# Altium PCB Rangefinder_PCB.PcbDoc
Units mm, origin at the board's own origin, x right, y up, seen from the top; angles counter-clockwise.
Board outline 27.89 x 25 mm, 2 copper layers (Top Layer, Bottom Layer); 38 components, 29 nets, 163 pads, 23 vias.
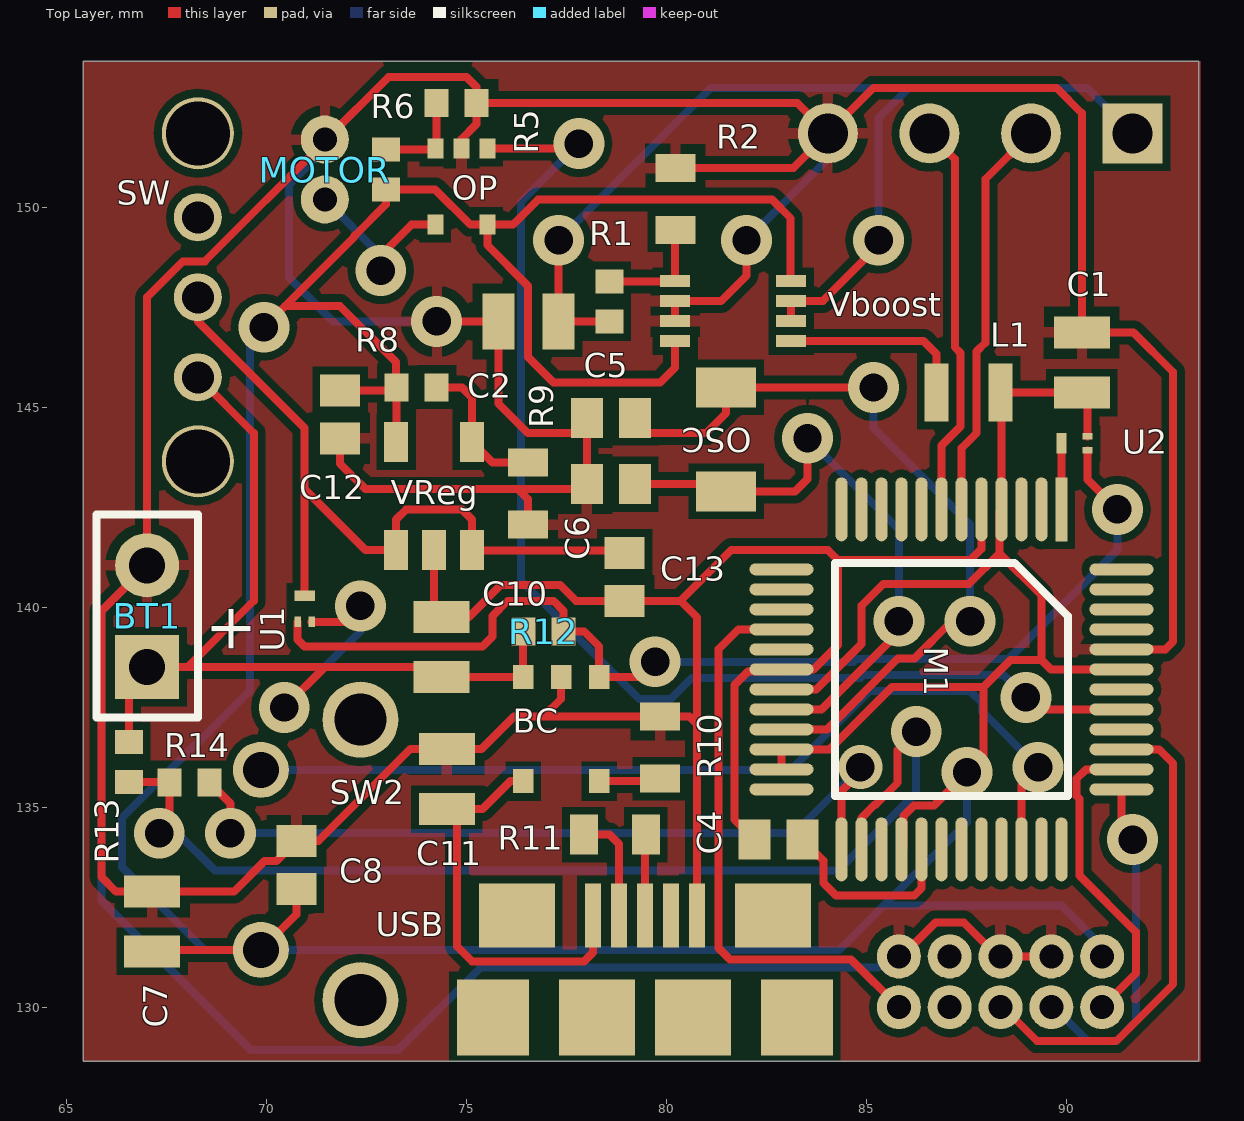
[diagram p0: Top Layer view]
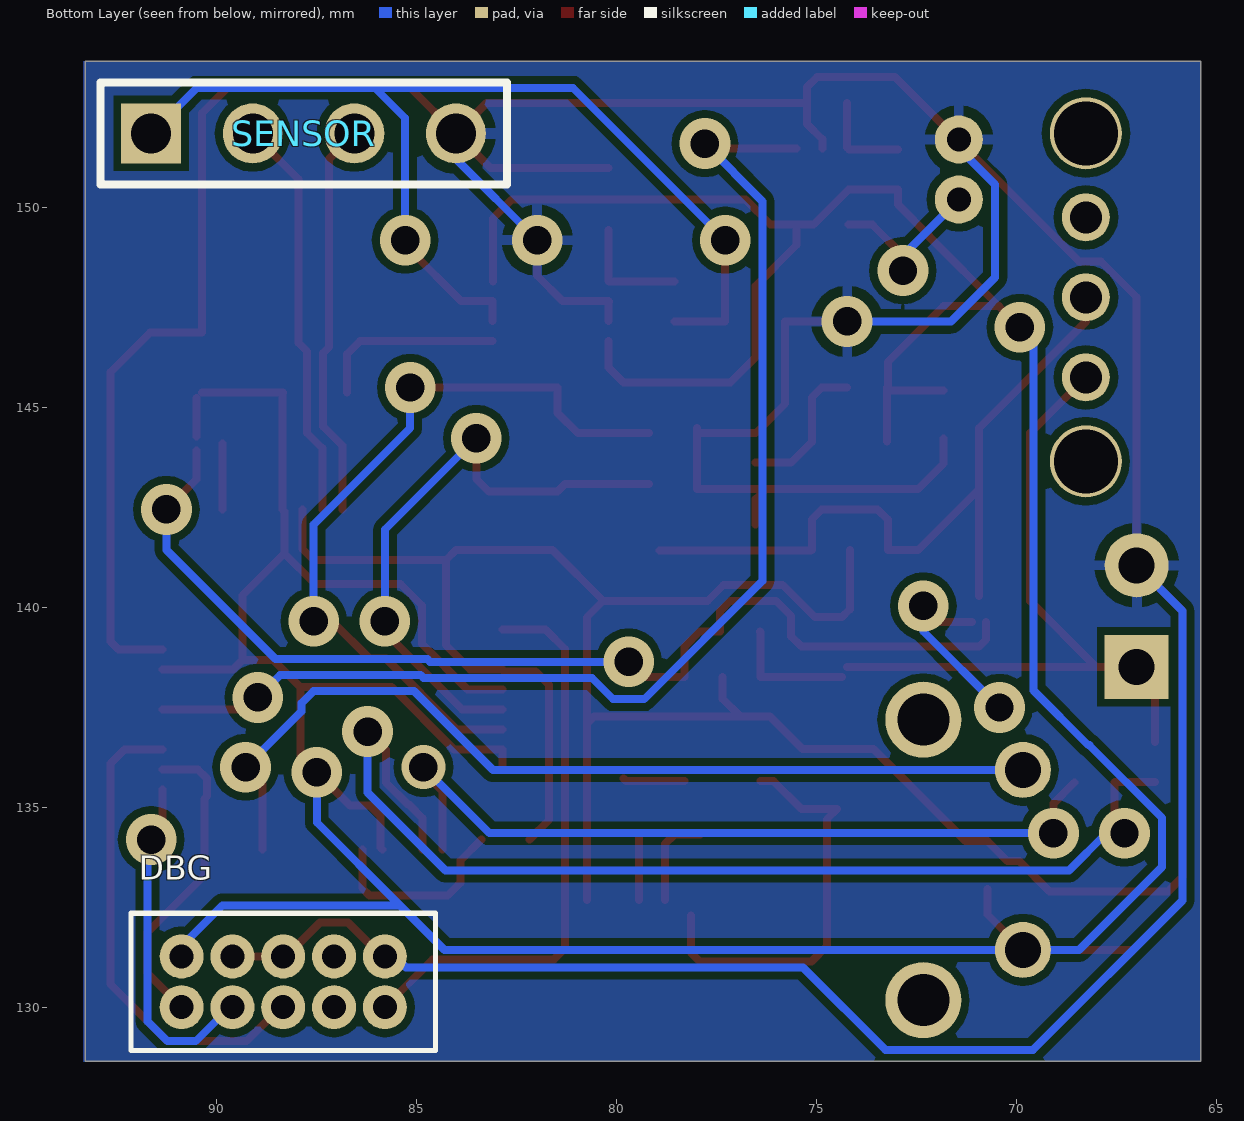
[diagram p1: Bottom Layer view, seen from below]

## Layer stack, top to bottom
Top Layer: signal copper 0.0356
Dielectric: dielectric 0.32, FR-4, Dk 4.8
Bottom Layer: signal copper 0.0356

## Board outline
65.405,128.67 93.294,128.67 93.294,153.67 65.405,153.67

## Design rules (kind name [scope] priority, off if disabled: settings)
Clearance [All] p1: gap=0.2
PolygonConnect [All] p1: connectstyle=Relief reliefconductorwidth=0.254 reliefentries=4 polygonreliefangle="90 Angle" airgapwidth=0.254
RoutingVias [All] p1: holewidth=0.711 width=1.27 viastyle="Through Hole" minholewidth=0.711 minwidth=1.27 maxholewidth=0.711 maxwidth=1.27
SolderMaskExpansion [All] p1: expansion=0.102
Width [All] p1: maxlimit=0.2 minlimit=0.2 preferedwidth=0.2
28 further rules are at their usual default settings.

## Components (designator, comment, footprint, x,y, rotation, side; value= is the part's Value field where it differs from the comment)
BC "MCP73831T" MCP73831T 78.308,138.271 r180 top
BT1 "Battery" BAT-2 67.005,139.795 r90 top
C1 "4.7u" "Capacitor 0805" 90.373,145.383 r90 top
C2 "10u" "Capacitor 0805" 77.292,147.161 r180 top
C4 "1u" "Capacitor 0402" 83.388,134.207 r180 top
C5 "12p" "Capacitor 0402" 79.197,144.748 r180 top
C6 "12p" "Capacitor 0402" 79.197,143.097 r180 top
C7 "4.7u" "Capacitor 0805" 67.132,131.413 r90 top
C8 "100n" "Capacitor 0402" 70.739,132.969 r90 top
C10 "4.7u" "Capacitor 0805" 74.371,138.271 r90 top
C11 "4.7u" "Capacitor 0805" 74.498,134.969 r90 top
C12 "1u" "Capacitor 0402" 71.831,144.24 r90 top
C13 "1u" "Capacitor 0402" 78.943,140.176 r90 top
DBG "20021111-00010T4LF" 20021111-00010T4LF 88.341,130.651 r0 bottom
L1 "LBR2012T4R7M" LBR2012T4R7M 88.341,145.383 r180 top
M1 "EFM32TG822" EFM32TG822 89.865,142.462 r270 top
MOTOR "Motor" Motor 71.45,150.209 r90 top
OP "LMV321SQ3T2G" LMV321SQ3T2G 75.514,151.479 r270 top
OSC "ST3215SB32768H5HSZA1" ST3215SB32768H5HSZA1 81.483,145.51 r270 top
R1 "1M" "Resistor 0403" 78.562,147.161 r90 top
R2 "324k" "Resistor 0603" 80.213,149.447 r90 top
R5 "1M" "Resistor 0403" 74.244,152.622 r0 top
R6 "1M" "Resistor 0403" 72.974,150.463 r90 top
R8 "1M" "Resistor 0403" 74.244,145.51 r180 top
R9 "536k" "Resistor 0603" 76.53,142.081 r90 top
R10 "3k" "Resistor 0603" 79.832,135.731 r90 top
R11 "150R" "Resistor 0603" 77.927,134.334 r0 top
R12 "18.7k" "Resistor 0403" 77.419,139.414 r180 top
R13 "1M" "Resistor 0403" 66.548,136.652 r270 top
R14 "1M" "Resistor 0403" 67.564,135.636 r0 top
SENSOR "Header 4" HDR1X4 91.643,151.86 r180 bottom
SW "EG1247" EG1247 68.275,145.764 r90 top
SW2 "2-1825027-0" 2-1825027-0 72.339,133.699 r270 top
U1 "CSD23382F4T" CSD23382F4T 70.942,140.303 r0 top
U2 "CSD23382F4T" CSD23382F4T 89.865,144.113 r90 top
USB "649-10118192-0001LF" 649-10118192-0001LF 79.451,129.762 r0 top
Vboost "MCP1640T-I/MC" MCP1640T-I/MC 80.207,148.172 r0 top
VReg "TPS78001DDCR" TPS78001DDCR 73.228,141.446 r0 top

## Footprints (in the part's own frame and the unit in brackets; to place one, negate y for a bottom-side part, rotate by r counter-clockwise, add the part's x,y. Pads: shape width x height; smd on the part's side, far side on the other; paste and mask are expansions set on the pad)
2-1825027-0 [mm]
  round 1.4 hole 0.9: 1(-2.25,-2.49) 2(2.25,-2.49)
  round 1.9 hole 1.3: ""(-3.505,0) ""(3.505,0)
649-10118192-0001LF [mm]
  rect 0.4x1.6 smd: 1(-1.3,2.55) 2(-0.65,2.55) 3(0,2.55) 4(0.65,2.55) 5(1.3,2.55)
  rect 1.8x1.9 smd: ""(-3.8,0) ""(3.8,0)
  rect 1.9x1.6 smd: ""(-3.2,2.55) ""(3.2,2.55)
  rect 1.9x1.9 smd: ""(-1.2,0) ""(1.2,0)
20021111-00010T4LF [mm]
  round 1.1 hole 0.6: 1(-2.54,0.635) 2(-1.27,0.635) 3(0,0.635) 4(1.27,0.635) 5(2.54,0.635) 6(-2.54,-0.635) 7(-1.27,-0.635) 8(0,-0.635) 9(1.27,-0.635) 10(2.54,-0.635)
  silkscreen extent -3.81,-1.72 3.81,1.72
BAT-2 [mm] "Battery; 2 Leads"
  rect 1.6x1.6 hole 0.9: 1(-1.27,0)
  round 1.6 hole 0.9: 2(1.27,0)
  silkscreen extent -2.54,-1.27 2.54,1.27
"Capacitor 0402" [mm]
  rect 0.8x1 smd: 1(0,0) 2(1.2,0)
"Capacitor 0805" [mm]
  rect 0.8x1.4 smd: 1(0,0) 2(1.5,0)
CSD23382F4T [mm]
  rect 0.51x0.26 smd: 1(0,0)
  rect 0.16x0.26 smd: 2(-0.175,-0.65) 3(0.175,-0.65)
EFM32TG822 [mm]
  rect 1.6x0.3 smd: 1(0,0)
  oval 1.6x0.3 smd: 2(0,-0.5) 3(0,-1) 4(0,-1.5) 5(0,-2) 6(0,-2.5) 7(0,-3) 8(0,-3.5) 9(0,-4) 10(0,-4.5) 11(0,-5) 12(0,-5.5) 25(8.5,-5.5) 26(8.5,-5) 27(8.5,-4.5) 28(8.5,-4) 29(8.5,-3.5) 30(8.5,-3) 31(8.5,-2.5) 32(8.5,-2) 33(8.5,-1.5) 34(8.5,-1) 35(8.5,-0.5) 36(8.5,0)
  oval 0.3x1.6 smd: 13(1.5,-7) 14(2,-7) 15(2.5,-7) 16(3,-7) 17(3.5,-7) 18(4,-7) 19(4.5,-7) 20(5,-7) 21(5.5,-7) 22(6,-7) 23(6.5,-7) 24(7,-7) 37(7,1.5) 38(6.5,1.5) 39(6,1.5) 40(5.5,1.5) 41(5,1.5) 42(4.5,1.5) 43(4,1.5) 44(3.5,1.5) 45(3,1.5) 46(2.5,1.5) 47(2,1.5) 48(1.5,1.5)
  silkscreen extent 1.33,-5.66 7.16,0.17
EG1247 [mm]
  round 1.2 hole 0.8: 1(0,0) 2(2,0) 3(4,0)
  round 1.8 hole 1.6: ""(-2.1,0) ""(6.1,0)
HDR1X4 [mm] "Connector; Header; 4 Position"
  rect 1.5x1.5 hole 1: 1(0,0)
  round 1.5 hole 1: 2(2.54,0) 3(5.08,0) 4(7.62,0)
  silkscreen extent -1.27,-1.27 8.89,1.27
LBR2012T4R7M [mm]
  rect 0.6x1.45 smd: 1(0,0) 2(1.6,0)
LMV321SQ3T2G [mm]
  rect 0.5x0.4 smd: 1(0,0) 2(0,-0.65) 3(0,-1.3) 4(1.9,-1.3) 5(1.9,0)
MCP1640T-I/MC [mm]
  rect 0.75x0.3 smd: 1(0,0) 2(0,-0.5) 3(0,-1) 4(0,-1.5) 5(2.9,-1.5) 6(2.9,-1) 7(2.9,-0.5) 8(2.9,0)
MCP73831T [mm]
  rect 0.51x0.6 smd: 1(0,0) 2(0.95,0) 3(1.9,0) 4(1.9,2.6) 5(0,2.6)
Motor [mm]
  round 1.2 hole 0.6: 1(0,0) 2(1.5,0)
"Resistor 0403" [mm]
  rect 0.6x0.7 smd: 1(0,0) 2(1,0)
"Resistor 0603" [mm]
  rect 0.7x1 smd: 1(0,0) 2(1.55,0)
ST3215SB32768H5HSZA1 [mm]
  rect 1x1.5 smd: 1(0,0) 2(2.6,0)
TPS78001DDCR [mm]
  rect 0.6x1 smd: 1(0,0) 2(0.95,0) 3(1.9,0) 4(1.9,2.7) 5(0,2.7)

## Part data
BT1: "Multicell Battery"
C1 C2 C7 C10 C11: library part "Capacitor 0805"
C4 C5 C6 C8 C12 C13: library part "Capacitor 0402"
R1 R5 R6 R8 R12 R13 R14: library part "Resistor 0403"
R2 R9 R10 R11: library part "Resistor 0603"
SENSOR: "Header, 4-Pin"

## Via types
v1: diameter 1.27, hole 0.711, Top Layer to Bottom Layer, 22 vias
v2: diameter 1.1, hole 0.711, Top Layer to Bottom Layer, 1 vias

## Nets (pads, with @x,y where several pads share a name; then routed paths per layer and width w, separated by ;. In a path a pad name is that pad's centre, name@x,y a point inside that pad or via, vN(x,y) a via of type N, cw(c..) or ccw(c..) an arc to the next point about the centre after c; other vN are vias at no path point)
3V5: C1.1 C7.1 C8.1 C12.2 DBG.10 L1.1 M1.4 M1.19 M1.22 M1.23 M1.28 M1.43 OP.5 R6.1 R8.2 SW2.2 U2.3 Vboost.4 Vboost.8 VReg.5 | length 114.7
  Top Layer w0.2: C7.1 67.168,131.449 SW2.2@69.214,131.449 ; SW2.2 70.739,132.339 C8.1 ; v1(69.926,147.016) 70.452,147.542 ; C12.2 R8.2@73.158,145.44 ; R8.2@73.228,145.44 73.228,146.145 71.831,147.542 70.452,147.542 ; VReg.5@73.244,144.162 R8.2 ; Vboost.4 80.207,146.012 79.832,145.637 77.165,145.637 76.53,146.272 76.53,148.05 75.514,149.066 OP.5 ; M1.23 M1.22 84.069,136.462 85.63,138.023 87.914,138.023 ; M1.19 83.733,137.962 84.866,139.095 84.866,140.055 85.414,140.603 87.556,140.603 88.315,141.362 ; Vboost.8@83.096,148.161 83.096,149.739 82.626,150.209 76.784,150.209 76.154,149.579 OP.5 ; M1.28 85.915,134.012 85.915,134.798 86.179,135.062 86.675,135.062 v1(87.503,135.89) 87.914,136.301 87.914,138.023 ; v1@87.048,135.962 v1@87.071,135.985 ; C1.1 L1.1 88.365,145.359 M1.4 88.315,142.412 88.315,141.362 ; U2.3 C1.1@90.515,145.241 ; M1.43 89.599,138.462 89.363,138.698 ; 70.452,147.542 72.196,149.286 72.196,149.304 72.974,150.082 R6.1 74.204,150.463 75.088,149.579 OP.5 ; 87.914,138.023 88.589,138.698 89.363,138.698 ; 88.315,141.362 89.363,140.314 89.363,138.698
  Bottom Layer w0.2: v1(69.926,147.016) 69.583,146.673 69.583,137.936 68.214,136.567 68.188,136.567 66.375,134.753 66.375,133.523 68.449,131.449 SW2.2 69.854,131.444 84.308,131.444 85.42,132.556 ; v1(87.503,135.89) 87.503,134.639 85.42,132.556 ; DBG.10@90.881,131.54 89.865,132.556 85.42,132.556
4V2: BC.3 BT1.1 C10.1 R12.2 R13.1 SW.1 U1.3 | length 27.1
  Top Layer w0.2: R13.1 66.548,138.068 BT1.1 68.021,138.525 ; SW.1 69.672,144.367 69.672,140.176 68.021,138.525 ; v1(70.434,137.509) 71.45,138.525 ; U1.3 71.943,139.653 v1(72.339,140.049) ; C10.1@74.244,138.525 71.45,138.525 ; C10.1 BC.3 76.408,139.403 R12.2 ; 68.021,138.525 71.45,138.525
  Bottom Layer w0.2: v1(70.434,137.509) 72.339,139.414 v1(72.339,140.049)
5V: C2.1 R1.1 SENSOR.1 Vboost.6 Vboost.7 | length 27.2
  Top Layer w0.2: v1(77.292,149.193) C2.1 R1.1 ; Vboost.6 Vboost.7 83.899,147.672 85.166,148.939 v1@85.166,149.193
  Bottom Layer w0.2: v1(77.292,149.193) 81.102,153.003 86.055,153.003 ; v1(85.293,149.193) 85.293,152.241 86.055,153.003 ; SENSOR.1 90.5,153.003 86.055,153.003
CHARGE: M1.1 U2.1 | length 1.7
  Top Layer w0.2: M1.1 U2.1
ECHO: M1.7 SENSOR.3 | length 9.9
  Top Layer w0.2: SENSOR.3 87.198,151.225 87.198,146.518 87.341,146.375 87.341,144.534 86.865,144.058 M1.7
GND: BC.2 BT1.2 C1.2 C2.2 C4.2 C5.2 C6.2 C7.2 C8.2 C10.2 C11.2 C12.1 C13.1 DBG.6 DBG.8 DBG.9 M1.5 M1.18 M1.44 MOTOR.2 OP.2 R2.2 R5.2 R9.1 R10.2 SENSOR.4 USB.5 Vboost.2 Vboost.3 VReg.2 | length 183.1
  Top Layer w0.2: C12.1 71.831,143.605 72.466,142.97 76.276,142.97 ; VReg.2 74.178,139.964 C10.2 75.051,139.771 75.856,140.576 77.331,140.576 77.731,140.176 C13.1 80.34,140.176 ; v1(74.244,147.161) C2.2 75.792,145.105 76.53,144.367 C5.2@77.997,144.367 ; OP.2 74.864,151.718 75.244,152.098 R5.2 ; R9.1 76.53,142.716 76.276,142.97 ; BC.2 77.358,137.728 76.911,137.281 ; C5.2@77.997,144.494 C5.2@77.997,144.367 ; Vboost.2@80.196,147.661 80.207,147.661 Vboost.3 ; Vboost.2 81.359,147.672 81.991,148.304 v1(81.991,149.193) ; R2.2 83.16,150.997 SENSOR.4 ; USB.5@80.751,132.691 80.751,137.098 ; C4.2 81.691,134.704 81.691,138.074 82.029,138.412 82.815,138.412 M1.18 83.667,138.462 84.277,139.072 84.277,141.192 ; DBG.6 85.869,131.286 86.719,132.136 87.423,132.136 88.273,131.286 DBG.8 DBG.9 ; DBG.6@85.801,131.54 DBG.6@85.869,131.54 ; M1.5 87.865,141.478 87.579,141.192 84.277,141.192 ; DBG.8@88.273,131.54 DBG.8@88.341,131.54 ; M1.44 92.461,138.962 92.659,139.16 92.659,145.891 91.667,146.883 C1.2 90.373,152.368 89.738,153.003 85.166,153.003 SENSOR.4 ; R5.2 83.261,152.622 SENSOR.4 ; R5.2 75.244,153.019 74.991,153.272 73.044,153.272 71.481,151.709 MOTOR.2 71.45,151.666 68.448,148.664 67.902,148.664 67.005,147.767 BT1.2 65.862,139.922 65.862,133.274 66.223,132.913 C7.2 69.183,132.913 69.939,133.669 70.239,133.669 C8.2 71.285,134.169 73.585,136.469 C11.2 75.363,136.469 76.175,137.281 76.911,137.281 ; 76.276,142.97 77.997,142.97 C6.2 C5.2@77.997,144.367 ; 76.911,137.281 R10.2 80.568,137.281 80.751,137.098 ; 80.34,140.176 80.751,139.765 80.751,137.098 ; 80.34,140.176 81.61,141.446 84.023,141.446 84.277,141.192
  Bottom Layer w0.2: BT1.2 65.862,139.922 65.862,132.683 69.601,128.944 73.279,128.944 75.348,131.013 85.274,131.013 DBG.6@85.801,131.54 ; MOTOR.2 71.45,151.482 70.55,150.582 70.55,148.262 71.651,147.161 v1(74.244,147.161) ; v1(81.991,149.193) 84.023,151.225 SENSOR.4
MOTOR: M1.41 OP.1 | length 30.7
  Top Layer w0.2: OP.1 77.673,151.479 v1(77.8,151.606) ; v1(88.976,137.763) 89.277,137.462 M1.41
  Bottom Layer w0.2: v1(77.8,151.606) 76.357,150.163 76.357,140.678 79.318,137.717 80.092,137.717 80.627,138.252 84.835,138.252 84.905,138.322 88.417,138.322 v1(88.976,137.763)
NetBC_5: BC.5 R10.1 | length 1.5
  Top Layer w0.2: BC.5 79.772,135.671 R10.1
NetC4_1: C4.1 M1.29 | length 4.9
  Top Layer w0.2: C4.1 83.915,133.68 83.915,133.126 84.231,132.81 86.182,132.81 86.365,132.993 M1.29
NetC13_2: C13.2 SW.2 U1.1 VReg.1 VReg.3 | length 18.9
  Top Layer w0.2: SW.2 68.275,147.161 70.942,144.494 70.942,142.97 ; U1.1 70.942,142.97 ; C13.2@78.934,141.431 75.143,141.431 VReg.3 75.128,142.213 74.879,142.462 73.482,142.462 73.228,142.208 VReg.1 72.466,141.446 70.942,142.97
NetL1_2: L1.2 Vboost.5 | length 4.7
  Top Layer w0.2: Vboost.5 86.417,146.672 86.741,146.348 L1.2
NetM1_25: M1.25 R14.2 | length 20
  Top Layer w0.2: R14.2 69.088,135.112 v1(69.088,134.366) ; M1.25 84.365,135.419 v2@84.836,135.89
  Bottom Layer w0.2: v1(69.088,134.366) 83.185,134.366 v2(84.836,136.017)
NetM1_26: M1.26 R13.2 R14.1 | length 27.6
  Top Layer w0.2: R13.2 67.548,135.652 R14.1 67.564,134.62 v1(67.31,134.366) ; M1.26 84.865,134.748 85.199,135.082 85.223,135.082 85.771,135.63 85.771,136.444 v1(86.233,136.906)
  Bottom Layer w0.2: v1(67.31,134.366) 67.766,134.366 68.701,133.431 84.282,133.431 86.233,135.382 v1(86.233,136.906)
NetM1_34: M1.34 SW2.1 | length 23.4
  Top Layer w0.2: M1.34 88.865,135.601 v1(89.281,136.017)
  Bottom Layer w0.2: SW2.1 83.098,135.949 85.071,137.922 87.579,137.922 87.884,137.617 87.884,137.414 v1(89.281,136.017)
NetMOTOR_1: MOTOR.1 OP.4 | length 4.4
  Top Layer w0.2: v1(72.847,148.431) 72.847,148.812 73.614,149.579 OP.4
  Bottom Layer w0.2: MOTOR.1 72.847,148.812 v1(72.847,148.431)
NetOP_3: OP.3 R5.1 R6.2 | length 2.4
  Top Layer w0.2: R6.2 74.198,151.463 OP.3 74.244,151.509 R5.1
NetR1_2: R1.2 R2.1 Vboost.1 | length 2.9
  Top Layer w0.2: R1.2 80.196,148.161 Vboost.1 80.207,149.441 R2.1
NetR8_1: R8.1 R9.2 VReg.4 | length 3.7
  Top Layer w0.2: R8.1 74.879,145.51 75.128,145.261 VReg.4 75.643,143.631 R9.2
NetR11_1: R11.1 USB.2 | length 2.4
  Top Layer w0.2: R11.1 78.562,134.334 78.801,134.095 USB.2@78.801,132.691
NetR11_2: R11.2 USB.3 | length 1.7
  Top Layer w0.2: USB.3@79.451,132.691 79.451,134.308 R11.2
RESETN: DBG.1 M1.16 | length 14.4
  Top Layer w0.2: M1.16 81.785,139.462 81.291,138.968 81.291,131.498 81.577,131.212 84.605,131.212 DBG.1
STAT: BC.1 R12.1 U1.2 U2.2 | length 27.4
  Top Layer w0.2: U1.2 70.767,139.208 70.942,139.033 75.387,139.033 75.641,139.287 75.641,139.795 76.022,140.176 77.165,140.176 77.419,139.922 R12.1 77.927,139.414 78.308,139.033 BC.1 79.324,138.271 v1(79.705,138.652) ; U2.2 90.515,143.209 v1(91.262,142.462)
  Bottom Layer w0.2: v1(79.705,138.652) 84.67,138.652 84.74,138.722 88.538,138.722 91.262,141.446 v1(91.262,142.462)
SWCLK: DBG.4 M1.37 | length 8.8
  Top Layer w0.2: DBG.4 DBG.4@89.679,130.016 ; DBG.4@89.611,130.27 DBG.4@89.679,130.27 ; M1.37 91.365,134.485 v1(91.643,134.207)
  Bottom Layer w0.2: DBG.4 89.679,130.016 90.529,129.166 91.233,129.166 91.731,129.664 91.731,134.119 v1(91.643,134.207)
SWDIO: DBG.5 M1.38 | length 8
  Top Layer w0.2: DBG.5 91.731,130.866 91.731,131.892 90.315,133.308 90.315,135.226 90.246,135.295 90.246,135.731 90.477,135.962 M1.38
  Bottom Layer w0.2: DBG.5@90.881,130.27 DBG.5@90.881,130.338
SWO: DBG.3 M1.39 | length 12.2
  Top Layer w0.2: DBG.3 88.409,130.016 89.259,129.166 91.233,129.166 92.659,130.592 92.659,136.112 92.309,136.462 M1.39
TRIG: M1.6 SENSOR.2 | length 10.1
  Top Layer w0.2: M1.6 87.365,143.992 87.741,144.368 87.741,146.408 87.96,146.627 87.96,150.717 SENSOR.2
VUSB: BC.4 C11.1 USB.1 | length 10.3
  Top Layer w0.2: BC.4 76.089,135.671 75.387,134.969 C11.1 74.752,134.715 74.752,131.54 75.133,131.159 77.927,131.159 78.151,131.383 USB.1
XTAL_N: C6.1 M1.20 OSC.2 | length 15.1
  Top Layer w0.2: C6.1 81.296,143.097 OSC.2 83.201,142.91 83.515,143.224 v1(83.515,144.24) ; M1.20 83.868,137.462 85.801,139.395 v1(85.801,139.668)
  Bottom Layer w0.2: v1(83.515,144.24) 85.801,141.954 v1(85.801,139.668)
XTAL_P: C5.1 M1.21 OSC.1 | length 19.5
  Top Layer w0.2: C5.1@79.197,144.367 80.975,144.367 81.483,144.875 OSC.1 v1(85.166,145.51) ; M1.21 84.003,136.962 85.774,138.733 86.188,138.733 87.123,139.668 v1(87.579,139.668)
  Bottom Layer w0.2: v1(85.166,145.51) 85.166,144.494 87.579,142.081 v1(87.579,139.668)
pads on no net: DBG.2 DBG.7 M1.2 M1.3 M1.8 M1.9 M1.10 M1.11 M1.12 M1.13 M1.14 M1.15 M1.17 M1.24 M1.27 M1.30 M1.31 M1.32 M1.33 M1.35 M1.36 M1.40 M1.42 M1.45 M1.46 M1.47 M1.48 SW2. SW. SW.3 USB. USB.4

## Polygon pours and split planes (outlines as drawn)
GND on Top Layer "Bottom Layer-No Net" (solid, pour order 30): 65.405,153.67 93.345,153.67 93.345,128.651 65.405,128.651
GND on Bottom Layer "Bottom Layer-No Net" (solid, pour order 40): 65.405,153.67 93.345,153.67 93.345,128.651 65.405,128.651

## Silkscreen, mask and mechanical layers (free items; w line width, h text height)
Mechanical 1:
  the board outline again, w0.254

## Text inside footprints (layer, text, board x,y; h text height)
BT1: Top Overlay "+" at 69.596,138.811 h1.15 r90